# EAGLE board target_control_panel (EAGLE 6.5.0)
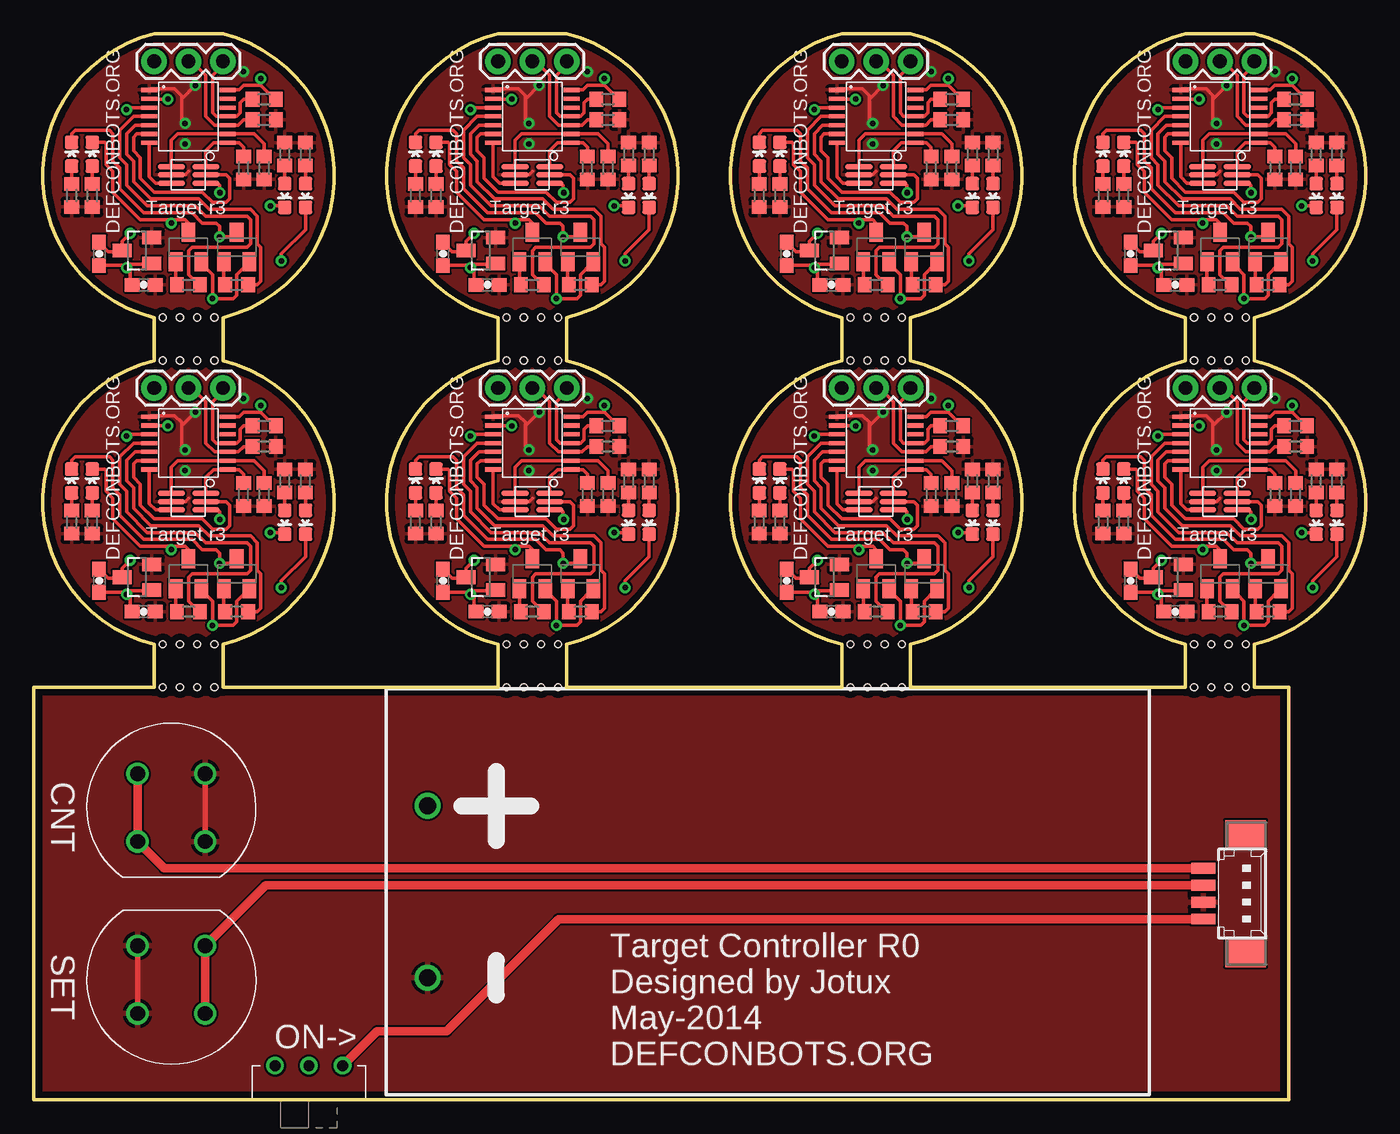
[diagram p0: board, top side]
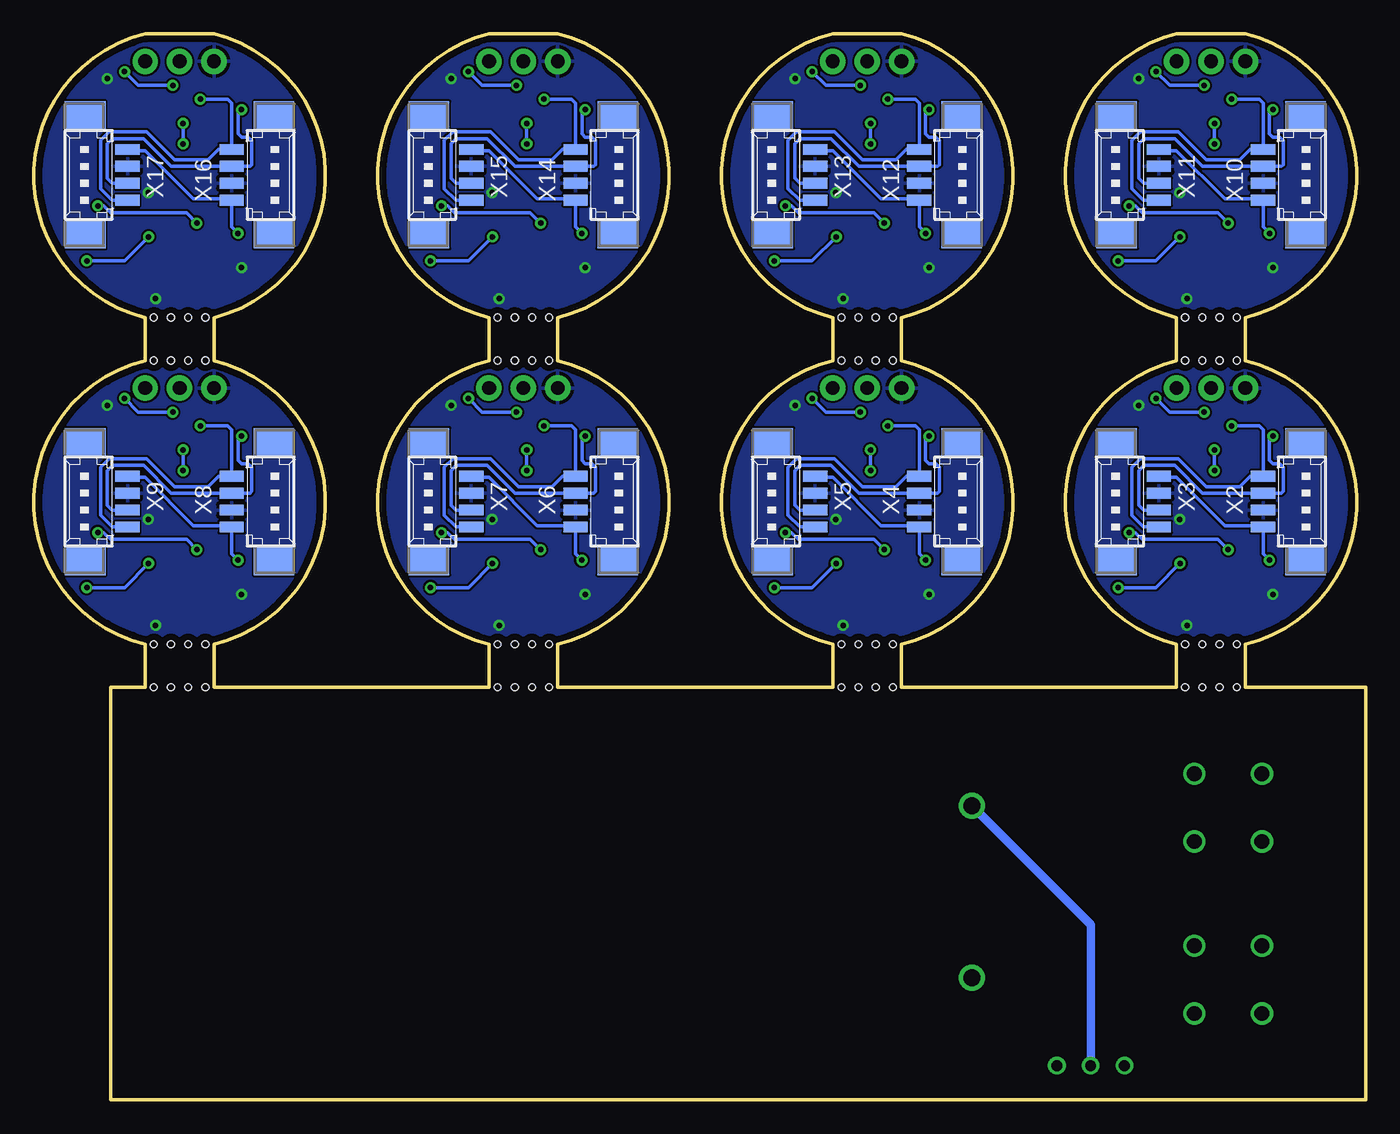
[diagram p1: board, bottom side, seen from below]

Size 98.4 x 78.74 mm. Coordinates in mm from the lower left corner, seen from the top.
Outline: 92.71,30.48 90.17,30.48 90.17,33.66 arc153 90.17,54.61 90.17,57.78 arc153 90.17,78.74 85.09,78.74 arc153 85.09,57.78 85.09,54.61 arc153 85.09,33.66 85.09,30.48 64.77,30.48 64.77,33.66 arc153 64.77,54.61 64.77,57.78 arc153 64.77,78.74 59.69,78.74 arc153 59.69,57.78 59.69,54.61 arc153 59.69,33.66 59.69,30.48 39.37,30.48 39.37,33.66 arc153 39.37,54.61 39.37,57.78 arc153 39.37,78.74 34.29,78.74 arc153 34.29,57.78 34.29,54.61 arc153 34.29,33.66 34.29,30.48 13.97,30.48 13.97,33.66 arc153 13.97,54.61 13.97,57.78 arc153 13.97,78.74 8.89,78.74 arc153 8.89,57.78 8.89,54.61 arc153 8.89,33.66 8.89,30.48 0,30.48 0,0 92.71,0 92.71,30.48
Copper layers (1*16): Top 0.035mm / dielectric 1.5mm / Bottom 0.035mm
Design rules "default": minimum track width 6mil, minimum drill 16mil, track to track 6mil, track to pad 6mil, pad to pad 6mil, via to via 6mil, smd to smd 6mil, copper to edge 20mil, drill to drill 8mil, minimum pad ring 10mil, minimum via ring 8mil, stop-mask expansion 4mil, vias tented up to drill 0mil, thermal gap 10mil
Holes 0.51 mm at 9.53,33.66 10.79,33.66 12.06,33.66 13.34,33.66 13.34,30.48 12.06,30.48 10.79,30.48 9.53,30.48 34.92,33.66 36.2,33.66 37.47,33.66 38.73,33.66 38.73,30.48 37.47,30.48 36.2,30.48 34.92,30.48 60.33,33.66 61.59,33.66 62.87,33.66 64.14,33.66 64.14,30.48 62.87,30.48 61.59,30.48 60.33,30.48 85.72,33.66 87,33.66 88.27,33.66 89.53,33.66 89.53,30.48 88.27,30.48 87,30.48 85.72,30.48 9.53,57.78 10.79,57.78 12.06,57.78 13.34,57.78 13.34,54.61 12.06,54.61 10.79,54.61 9.53,54.61 34.92,57.78 36.2,57.78 37.47,57.78 38.73,57.78 38.73,54.61 37.47,54.61 36.2,54.61 34.92,54.61 60.33,57.78 61.59,57.78 62.87,57.78 64.14,57.78 64.14,54.61 62.87,54.61 61.59,54.61 60.33,54.61 85.72,57.78 87,57.78 88.27,57.78 89.53,57.78 89.53,54.61 88.27,54.61 87,54.61 85.72,54.61

## Footprints (pad centres in the part's own frame; a part is rotated, then mirrored left to right if it is on the bottom)
0603-CAP = smd 1.1 x 1: 1 -0.85,0; 2 0.85,0
LED-0603 = smd 1 x 1: A 0,-0.877; C 0,0.877
BH9V-PC-ND = drill 1.27: N 8.64,-3.05; P 21.34,-3.05
1X03 = drill 1.016 pad 1.88: 1 0,0; 2 2.54,0; 3 5.08,0
R0603 = smd 1 x 1.1: 1 -0.85,0; 2 0.85,0
D6F = drill 1.1: A1 2.5,2.5; A2 -2.5,2.5; B1 2.5,-2.5; B2 -2.5,-2.5
EG1270 = drill 0.8: P$1 0,2.5; P$2 0,0; P$3 0,-2.5
SOT23-BEC = smd 1 x 1.4: B -0.95,-1.1; C 0,1.1; E 0.95,-1.1
SOT23 = smd 1 x 1.4: 1 -0.95,-1.1; 2 0.95,-1.1; 3 0,1.1
PW14 = smd 0.3 x 1.2: 1 -1.95,-2.9; 2 -1.3,-2.9; 3 -0.65,-2.9; 4 0,-2.9; 5 0.65,-2.9; 6 1.3,-2.9; 7 1.95,-2.9; 8 1.95,2.9; 9 1.3,2.9; 10 0.65,2.9; 11 0,2.9; 12 -0.65,2.9; 13 -1.3,2.9; 14 -1.95,2.9
CS-6 = smd 0.4 x 2: A1 -0.61,1.28; A2 0,1.28; A3 0.61,1.28; B1 -0.61,-1.27; B2 0,-1.27; B3 0.61,-1.27
53398-04 = smd 0.8 x 1.8: 1 1.875,-2.5; 2 0.625,-2.5; 3 -0.625,-2.5; 4 -1.875,-2.5 | smd 2.1 x 3: S1 4.375,0.625; S2 -4.375,0.625

## Placement (x,y rotation side)
C1  C1608X5R1C106M080AB  [0603-CAP]  4.83,38.35 270 top
C2  C1608X5R1C106M080AB  [0603-CAP]  8.13,36.07 180 top
C3  C1608X5R1C106M080AB  [0603-CAP]  30.23,38.35 270 top
C4  C1608X5R1C106M080AB  [0603-CAP]  33.53,36.07 180 top
C5  C1608X5R1C106M080AB  [0603-CAP]  55.63,38.35 270 top
C6  C1608X5R1C106M080AB  [0603-CAP]  58.93,36.07 180 top
C7  C1608X5R1C106M080AB  [0603-CAP]  81.03,38.35 270 top
C8  C1608X5R1C106M080AB  [0603-CAP]  84.33,36.07 180 top
C9  C1608X5R1C106M080AB  [0603-CAP]  4.83,62.48 270 top
C10  C1608X5R1C106M080AB  [0603-CAP]  8.13,60.2 180 top
C11  C1608X5R1C106M080AB  [0603-CAP]  30.23,62.48 270 top
C12  C1608X5R1C106M080AB  [0603-CAP]  33.53,60.2 180 top
C13  C1608X5R1C106M080AB  [0603-CAP]  55.63,62.48 270 top
C14  C1608X5R1C106M080AB  [0603-CAP]  58.93,60.2 180 top
C15  C1608X5R1C106M080AB  [0603-CAP]  81.03,62.48 270 top
C16  C1608X5R1C106M080AB  [0603-CAP]  84.33,60.2 180 top
D1  VLMB1300-GS08  [LED-0603]  20.07,42.67 180 top
D2  VLMB1300-GS08  [LED-0603]  2.79,45.72 0 top
D3  VLMS1300-GS08  [LED-0603]  18.54,42.67 180 top
D4  VLMS1300-GS08  [LED-0603]  4.32,45.72 0 top
D5  VLMB1300-GS08  [LED-0603]  28.19,45.72 0 top
D6  VLMB1300-GS08  [LED-0603]  45.47,42.67 180 top
D7  VLMS1300-GS08  [LED-0603]  43.94,42.67 180 top
D8  VLMS1300-GS08  [LED-0603]  29.72,45.72 0 top
D9  VLMB1300-GS08  [LED-0603]  53.59,45.72 0 top
D10  VLMB1300-GS08  [LED-0603]  70.87,42.67 180 top
D11  VLMS1300-GS08  [LED-0603]  69.34,42.67 180 top
D12  VLMS1300-GS08  [LED-0603]  55.12,45.72 0 top
D13  VLMB1300-GS08  [LED-0603]  78.99,45.72 0 top
D14  VLMB1300-GS08  [LED-0603]  96.27,42.67 180 top
D15  VLMS1300-GS08  [LED-0603]  94.74,42.67 180 top
D16  VLMS1300-GS08  [LED-0603]  80.52,45.72 0 top
D17  VLMB1300-GS08  [LED-0603]  2.79,69.85 0 top
D18  VLMB1300-GS08  [LED-0603]  20.07,66.8 180 top
D19  VLMS1300-GS08  [LED-0603]  18.54,66.8 180 top
D20  VLMS1300-GS08  [LED-0603]  4.32,69.85 0 top
D21  VLMB1300-GS08  [LED-0603]  28.19,69.85 0 top
D22  VLMB1300-GS08  [LED-0603]  45.47,66.8 180 top
D23  VLMS1300-GS08  [LED-0603]  43.94,66.8 180 top
D24  VLMS1300-GS08  [LED-0603]  29.72,69.85 0 top
D25  VLMB1300-GS08  [LED-0603]  53.59,69.85 0 top
D26  VLMB1300-GS08  [LED-0603]  70.87,66.8 180 top
D27  VLMS1300-GS08  [LED-0603]  69.34,66.8 180 top
D28  VLMS1300-GS08  [LED-0603]  55.12,69.85 0 top
D29  VLMB1300-GS08  [LED-0603]  78.99,69.85 0 top
D30  VLMB1300-GS08  [LED-0603]  96.27,66.8 180 top
D31  VLMS1300-GS08  [LED-0603]  94.74,66.8 180 top
D32  VLMS1300-GS08  [LED-0603]  80.52,69.85 0 top
G1  AB9VBH9V  [BH9V-PC-ND]  26.04,0.38 90 top
JP1  [1X03]  13.97,52.58 180 top
JP2  [1X03]  39.37,52.58 180 top
JP3  [1X03]  64.77,52.58 180 top
JP4  [1X03]  90.17,52.58 180 top
JP5  [1X03]  13.97,76.71 180 top
JP6  [1X03]  39.37,76.71 180 top
JP7  [1X03]  64.77,76.71 180 top
JP8  [1X03]  90.17,76.71 180 top
R1  RK73H1JTTD4702F  [R0603]  17.02,48.26 0 top
R2  RK73H1JTTD4702F  [R0603]  17.02,49.78 180 top
R3  CRCW0603200RFKEA  [R0603]  20.07,45.72 90 top
R4  CRCW0603200RFKEA  [R0603]  2.79,42.67 270 top
R5  CRCW0603200RFKEA  [R0603]  14.99,36.07 0 top
R6  CRCW0603200RFKEA  [R0603]  18.54,45.72 90 top
R7  CRCW0603200RFKEA  [R0603]  4.32,42.67 270 top
R8  CRCW0603200RFKEA  [R0603]  11.43,36.07 0 top
R9  RK73H1JTTD4701F  [R0603]  17.02,44.7 270 top
R10  RK73H1JTTD4701F  [R0603]  15.49,44.7 270 top
R11  CRCW0603200RFKEA  [R0603]  28.19,42.67 270 top
R12  CRCW0603200RFKEA  [R0603]  45.47,45.72 90 top
R13  CRCW0603200RFKEA  [R0603]  40.39,36.07 0 top
R14  CRCW0603200RFKEA  [R0603]  43.94,45.72 90 top
R15  RK73H1JTTD4702F  [R0603]  42.42,48.26 0 top
R16  RK73H1JTTD4702F  [R0603]  42.42,49.78 180 top
R17  CRCW0603200RFKEA  [R0603]  29.72,42.67 270 top
R18  CRCW0603200RFKEA  [R0603]  36.83,36.07 0 top
R19  RK73H1JTTD4701F  [R0603]  42.42,44.7 270 top
R20  RK73H1JTTD4701F  [R0603]  40.89,44.7 270 top
R21  CRCW0603200RFKEA  [R0603]  53.59,42.67 270 top
R22  CRCW0603200RFKEA  [R0603]  70.87,45.72 90 top
R23  CRCW0603200RFKEA  [R0603]  65.79,36.07 0 top
R24  CRCW0603200RFKEA  [R0603]  69.34,45.72 90 top
R25  RK73H1JTTD4702F  [R0603]  67.82,48.26 0 top
R26  RK73H1JTTD4702F  [R0603]  67.82,49.78 180 top
R27  CRCW0603200RFKEA  [R0603]  55.12,42.67 270 top
R28  CRCW0603200RFKEA  [R0603]  62.23,36.07 0 top
R29  RK73H1JTTD4701F  [R0603]  67.82,44.7 270 top
R30  RK73H1JTTD4701F  [R0603]  66.29,44.7 270 top
R31  CRCW0603200RFKEA  [R0603]  78.99,42.67 270 top
R32  CRCW0603200RFKEA  [R0603]  96.27,45.72 90 top
R33  CRCW0603200RFKEA  [R0603]  91.19,36.07 0 top
R34  CRCW0603200RFKEA  [R0603]  94.74,45.72 90 top
R35  RK73H1JTTD4702F  [R0603]  93.22,48.26 0 top
R36  RK73H1JTTD4702F  [R0603]  93.22,49.78 180 top
R37  CRCW0603200RFKEA  [R0603]  80.52,42.67 270 top
R38  CRCW0603200RFKEA  [R0603]  87.63,36.07 0 top
R39  RK73H1JTTD4701F  [R0603]  93.22,44.7 270 top
R40  RK73H1JTTD4701F  [R0603]  91.69,44.7 270 top
R41  CRCW0603200RFKEA  [R0603]  2.79,66.8 270 top
R42  CRCW0603200RFKEA  [R0603]  20.07,69.85 90 top
R43  CRCW0603200RFKEA  [R0603]  14.99,60.2 0 top
R44  CRCW0603200RFKEA  [R0603]  18.54,69.85 90 top
R45  RK73H1JTTD4702F  [R0603]  17.02,72.39 0 top
R46  RK73H1JTTD4702F  [R0603]  17.02,73.91 180 top
R47  CRCW0603200RFKEA  [R0603]  4.32,66.8 270 top
R48  CRCW0603200RFKEA  [R0603]  11.43,60.2 0 top
R49  RK73H1JTTD4701F  [R0603]  17.02,68.83 270 top
R50  RK73H1JTTD4701F  [R0603]  15.49,68.83 270 top
R51  CRCW0603200RFKEA  [R0603]  28.19,66.8 270 top
R52  CRCW0603200RFKEA  [R0603]  45.47,69.85 90 top
R53  CRCW0603200RFKEA  [R0603]  40.39,60.2 0 top
R54  CRCW0603200RFKEA  [R0603]  43.94,69.85 90 top
R55  RK73H1JTTD4702F  [R0603]  42.42,72.39 0 top
R56  RK73H1JTTD4702F  [R0603]  42.42,73.91 180 top
R57  CRCW0603200RFKEA  [R0603]  29.72,66.8 270 top
R58  CRCW0603200RFKEA  [R0603]  36.83,60.2 0 top
R59  RK73H1JTTD4701F  [R0603]  42.42,68.83 270 top
R60  RK73H1JTTD4701F  [R0603]  40.89,68.83 270 top
R61  CRCW0603200RFKEA  [R0603]  53.59,66.8 270 top
R62  CRCW0603200RFKEA  [R0603]  70.87,69.85 90 top
R63  CRCW0603200RFKEA  [R0603]  65.79,60.2 0 top
R64  CRCW0603200RFKEA  [R0603]  69.34,69.85 90 top
R65  RK73H1JTTD4702F  [R0603]  67.82,72.39 0 top
R66  RK73H1JTTD4702F  [R0603]  67.82,73.91 180 top
R67  CRCW0603200RFKEA  [R0603]  55.12,66.8 270 top
R68  CRCW0603200RFKEA  [R0603]  62.23,60.2 0 top
R69  RK73H1JTTD4701F  [R0603]  67.82,68.83 270 top
R70  RK73H1JTTD4701F  [R0603]  66.29,68.83 270 top
R71  CRCW0603200RFKEA  [R0603]  78.99,66.8 270 top
R72  CRCW0603200RFKEA  [R0603]  96.27,69.85 90 top
R73  CRCW0603200RFKEA  [R0603]  91.19,60.2 0 top
R74  CRCW0603200RFKEA  [R0603]  94.74,69.85 90 top
R75  RK73H1JTTD4702F  [R0603]  93.22,72.39 0 top
R76  RK73H1JTTD4702F  [R0603]  93.22,73.91 180 top
R77  CRCW0603200RFKEA  [R0603]  80.52,66.8 270 top
R78  CRCW0603200RFKEA  [R0603]  87.63,60.2 0 top
R79  RK73H1JTTD4701F  [R0603]  93.22,68.83 270 top
R80  RK73H1JTTD4701F  [R0603]  91.69,68.83 270 top
S1  [D6F]  10.16,8.89 270 top
S2  [D6F]  10.16,21.59 90 top
S3  [EG1270]  20.32,2.54 270 top
T1  PMBT4401,215  [SOT23-BEC]  14.99,38.86 0 top
T2  PMBT4401,215  [SOT23-BEC]  11.43,38.86 0 top
T3  PMBT4401,215  [SOT23-BEC]  40.39,38.86 0 top
T4  PMBT4401,215  [SOT23-BEC]  36.83,38.86 0 top
T5  PMBT4401,215  [SOT23-BEC]  65.79,38.86 0 top
T6  PMBT4401,215  [SOT23-BEC]  62.23,38.86 0 top
T7  PMBT4401,215  [SOT23-BEC]  91.19,38.86 0 top
T8  PMBT4401,215  [SOT23-BEC]  87.63,38.86 0 top
T9  PMBT4401,215  [SOT23-BEC]  14.99,62.99 0 top
T10  PMBT4401,215  [SOT23-BEC]  11.43,62.99 0 top
T11  PMBT4401,215  [SOT23-BEC]  40.39,62.99 0 top
T12  PMBT4401,215  [SOT23-BEC]  36.83,62.99 0 top
T13  PMBT4401,215  [SOT23-BEC]  65.79,62.99 0 top
T14  PMBT4401,215  [SOT23-BEC]  62.23,62.99 0 top
T15  PMBT4401,215  [SOT23-BEC]  91.19,62.99 0 top
T16  PMBT4401,215  [SOT23-BEC]  87.63,62.99 0 top
U1  MCP1703T-3002E/CB  [SOT23]  7.62,38.61 90 top
U2  MSP430G2452IPW14R  [PW14]  11.43,48.51 270 top
U3  TCS3414CS  [CS-6]  11.43,44.2 270 top
U4  MCP1703T-3002E/CB  [SOT23]  33.02,38.61 90 top
U5  TCS3414CS  [CS-6]  36.83,44.2 270 top
U6  MSP430G2452IPW14R  [PW14]  36.83,48.51 270 top
U7  MCP1703T-3002E/CB  [SOT23]  58.42,38.61 90 top
U8  TCS3414CS  [CS-6]  62.23,44.2 270 top
U9  MSP430G2452IPW14R  [PW14]  62.23,48.51 270 top
U10  MCP1703T-3002E/CB  [SOT23]  83.82,38.61 90 top
U11  TCS3414CS  [CS-6]  87.63,44.2 270 top
U12  MSP430G2452IPW14R  [PW14]  87.63,48.51 270 top
U13  MCP1703T-3002E/CB  [SOT23]  7.62,62.74 90 top
U14  TCS3414CS  [CS-6]  11.43,68.33 270 top
U15  MSP430G2452IPW14R  [PW14]  11.43,72.64 270 top
U16  MCP1703T-3002E/CB  [SOT23]  33.02,62.74 90 top
U17  TCS3414CS  [CS-6]  36.83,68.33 270 top
U18  MSP430G2452IPW14R  [PW14]  36.83,72.64 270 top
U19  MCP1703T-3002E/CB  [SOT23]  58.42,62.74 90 top
U20  TCS3414CS  [CS-6]  62.23,68.33 270 top
U21  MSP430G2452IPW14R  [PW14]  62.23,72.64 270 top
U22  MCP1703T-3002E/CB  [SOT23]  83.82,62.74 90 top
U23  TCS3414CS  [CS-6]  87.63,68.33 270 top
U24  MSP430G2452IPW14R  [PW14]  87.63,72.64 270 top
X1  DF13-4P-1.25V(50)  [53398-04]  88.9,15.24 270 top
X2  DF13-4P-1.25V(50)  [53398-04]  5.08,44.2 270 bottom
X3  DF13-4P-1.25V(50)  [53398-04]  17.78,44.2 90 bottom
X4  DF13-4P-1.25V(50)  [53398-04]  30.48,44.2 270 bottom
X5  DF13-4P-1.25V(50)  [53398-04]  43.18,44.2 90 bottom
X6  DF13-4P-1.25V(50)  [53398-04]  55.88,44.2 270 bottom
X7  DF13-4P-1.25V(50)  [53398-04]  68.58,44.2 90 bottom
X8  DF13-4P-1.25V(50)  [53398-04]  81.28,44.2 270 bottom
X9  DF13-4P-1.25V(50)  [53398-04]  93.98,44.2 90 bottom
X10  DF13-4P-1.25V(50)  [53398-04]  5.08,68.33 270 bottom
X11  DF13-4P-1.25V(50)  [53398-04]  17.78,68.33 90 bottom
X12  DF13-4P-1.25V(50)  [53398-04]  30.48,68.33 270 bottom
X13  DF13-4P-1.25V(50)  [53398-04]  43.18,68.33 90 bottom
X14  DF13-4P-1.25V(50)  [53398-04]  55.88,68.33 270 bottom
X15  DF13-4P-1.25V(50)  [53398-04]  68.58,68.33 90 bottom
X16  DF13-4P-1.25V(50)  [53398-04]  81.28,68.33 270 bottom
X17  DF13-4P-1.25V(50)  [53398-04]  93.98,68.33 90 bottom

## Library data of the parts
C1-C16 = SparkFun-Passives
D1-D32 = SparkFun-LED
G1 = joe
JP1-JP8 = SparkFun-Connectors
R1-R80 = rcl
S1-S3 U3 U5 U8 U11 U14 U17 U20 U23 = torpedo
T1-T16 = transistor
U1 U4 U7 U10 U13 U16 U19 U22 = linear
U2 U6 U9 U12 U15 U18 U21 U24 = TI_MSP430_v16
X1-X17 = con-molex; OC_FARNELL: 1125367; OC_NEWARK: unknown

## Nets
+3V1: C4.1 R11.2 R12.2 R14.2 R15.2 R17.2 R19.2 R20.2 U4.2 U5.B2 U6.1
+3V2: C6.1 R21.2 R22.2 R24.2 R25.2 R27.2 R29.2 R30.2 U7.2 U8.B2 U9.1
+3V3: C2.1 R1.2 R3.2 R4.2 R6.2 R7.2 R9.2 R10.2 U1.2 U2.1 U3.B2
+3V4: C8.1 R31.2 R32.2 R34.2 R35.2 R37.2 R39.2 R40.2 U10.2 U11.B2 U12.1
+3V5: C10.1 R41.2 R42.2 R44.2 R45.2 R47.2 R49.2 R50.2 U13.2 U14.B2 U15.1
+3V6: C12.1 R51.2 R52.2 R54.2 R55.2 R57.2 R59.2 R60.2 U16.2 U17.B2 U18.1
+3V7: C14.1 R61.2 R62.2 R64.2 R65.2 R67.2 R69.2 R70.2 U19.2 U20.B2 U21.1
+3V8: C16.1 R71.2 R72.2 R74.2 R75.2 R77.2 R79.2 R80.2 U22.2 U23.B2 U24.1
BLUE_LED: R5.2 U2.5
BLUE_LED1: R13.2 U6.5
BLUE_LED2: R23.2 U9.5
BLUE_LED3: R33.2 U12.5
BLUE_LED4: R43.2 U15.5
BLUE_LED5: R53.2 U18.5
BLUE_LED6: R63.2 U21.5
BLUE_LED7: R73.2 U24.5
CLK: R10.1 U2.8 U3.A1
CLK1: R20.1 U5.A1 U6.8
CLK2: R30.1 U8.A1 U9.8
CLK3: R40.1 U11.A1 U12.8
CLK4: R50.1 U14.A1 U15.8
CLK5: R60.1 U17.A1 U18.8
CLK6: R70.1 U20.A1 U21.8
CLK7: R80.1 U23.A1 U24.8
CNT: S2.A1 S2.A2 X1.4
CNT1: U2.2 X2.4 X3.4
CNT2: U6.2 X4.4 X5.4
CNT3: U9.2 X6.4 X7.4
CNT4: U12.2 X8.4 X9.4
CNT5: U15.2 X10.4 X11.4
CNT6: U18.2 X12.4 X13.4
CNT7: U21.2 X14.4 X15.4
CNT8: U24.2 X16.4 X17.4
DAT: R9.1 U2.9 U3.B1
DAT1: R19.1 U5.B1 U6.9
DAT2: R29.1 U8.B1 U9.9
DAT3: R39.1 U11.B1 U12.9
DAT4: R49.1 U14.B1 U15.9
DAT5: R59.1 U17.B1 U18.9
DAT6: R69.1 U20.B1 U21.9
DAT7: R79.1 U23.B1 U24.9
GND1: C1.2 C2.2 JP1.3 R2.1 T1.E T2.E U1.1 U2.14 U3.A3 X2.2 X3.2
GND2: C3.2 C4.2 JP2.3 R16.1 T3.E T4.E U4.1 U5.A3 U6.14 X4.2 X5.2
GND3: C5.2 C6.2 JP3.3 R26.1 T5.E T6.E U7.1 U8.A3 U9.14 X6.2 X7.2
GND4: C7.2 C8.2 JP4.3 R36.1 T7.E T8.E U10.1 U11.A3 U12.14 X8.2 X9.2
GND5: C9.2 C10.2 JP5.3 R46.1 T9.E T10.E U13.1 U14.A3 U15.14 X10.2 X11.2
GND6: C11.2 C12.2 JP6.3 R56.1 T11.E T12.E U16.1 U17.A3 U18.14 X12.2 X13.2
GND7: C13.2 C14.2 JP7.3 R66.1 T13.E T14.E U19.1 U20.A3 U21.14 X14.2 X15.2
GND8: C15.2 C16.2 JP8.3 R76.1 T15.E T16.E U22.1 U23.A3 U24.14 X16.2 X17.2
GND9: G1.N S1.B1 S1.B2 S2.B1 S2.B2 X1.2
INT: U2.7 U3.B3
INT1: U5.B3 U6.7
INT2: U8.B3 U9.7
INT3: U11.B3 U12.7
INT4: U14.B3 U15.7
INT5: U17.B3 U18.7
INT6: U20.B3 U21.7
INT7: U23.B3 U24.7
LED: D1.C D2.C T1.C
LED1: D5.C D6.C T3.C
LED2: D9.C D10.C T5.C
LED3: D13.C D14.C T7.C
LED4: D17.C D18.C T9.C
LED5: D21.C D22.C T11.C
LED6: D25.C D26.C T13.C
LED7: D29.C D30.C T15.C
N$1: D4.A R7.1
N$2: D3.C D4.C T2.C
N$3: R8.1 T2.B
N$4: G1.P S3.P$2
N$5: D5.A R11.1
N$6: D2.A R4.1
N$7: D1.A R3.1
N$8: D6.A R12.1
N$9: R13.1 T3.B
N$10: D3.A R6.1
N$11: D7.A R14.1
N$12: D8.A R17.1
N$13: D7.C D8.C T4.C
N$14: R18.1 T4.B
N$15: D9.A R21.1
N$16: D10.A R22.1
N$17: R23.1 T5.B
N$18: R5.1 T1.B
N$19: D11.A R24.1
N$20: D12.A R27.1
N$21: D11.C D12.C T6.C
N$22: R28.1 T6.B
N$23: D13.A R31.1
N$24: D14.A R32.1
N$25: R33.1 T7.B
N$26: D15.A R34.1
N$27: D16.A R37.1
N$28: D15.C D16.C T8.C
N$29: R38.1 T8.B
N$30: D17.A R41.1
N$31: D18.A R42.1
N$32: R43.1 T9.B
N$33: D19.A R44.1
N$34: D20.A R47.1
N$35: D19.C D20.C T10.C
N$36: R48.1 T10.B
N$37: D21.A R51.1
N$38: D22.A R52.1
N$39: R53.1 T11.B
N$40: D23.A R54.1
N$41: D24.A R57.1
N$42: D23.C D24.C T12.C
N$43: R58.1 T12.B
N$44: D25.A R61.1
N$45: D26.A R62.1
N$46: R63.1 T13.B
N$47: D27.A R64.1
N$48: D28.A R67.1
N$49: D27.C D28.C T14.C
N$50: R68.1 T14.B
N$51: D29.A R71.1
N$52: D30.A R72.1
N$53: R73.1 T15.B
N$54: D31.A R74.1
N$55: D32.A R77.1
N$56: D31.C D32.C T16.C
N$57: R78.1 T16.B
RED_LED: R8.2 U2.4
RED_LED1: R18.2 U6.4
RED_LED2: R28.2 U9.4
RED_LED3: R38.2 U12.4
RED_LED4: R48.2 U15.4
RED_LED5: R58.2 U18.4
RED_LED6: R68.2 U21.4
RED_LED7: R78.2 U24.4
RST: JP1.2 R1.1 U2.10
RST1: JP2.2 R15.1 U6.10
RST2: JP3.2 R25.1 U9.10
RST3: JP4.2 R35.1 U12.10
RST4: JP5.2 R45.1 U15.10
RST5: JP6.2 R55.1 U18.10
RST6: JP7.2 R65.1 U21.10
RST7: JP8.2 R75.1 U24.10
SET: S1.A1 S1.A2 X1.3
SET1: U2.3 X2.3 X3.3
SET2: U6.3 X4.3 X5.3
SET3: U9.3 X6.3 X7.3
SET4: U12.3 X8.3 X9.3
SET5: U15.3 X10.3 X11.3
SET6: U18.3 X12.3 X13.3
SET7: U21.3 X14.3 X15.3
SET8: U24.3 X16.3 X17.3
SYNC: U2.6 U3.A2
SYNC1: U5.A2 U6.6
SYNC2: U8.A2 U9.6
SYNC3: U11.A2 U12.6
SYNC4: U14.A2 U15.6
SYNC5: U17.A2 U18.6
SYNC6: U20.A2 U21.6
SYNC7: U23.A2 U24.6
TEST: JP1.1 R2.2 U2.11
TEST1: JP2.1 R16.2 U6.11
TEST2: JP3.1 R26.2 U9.11
TEST3: JP4.1 R36.2 U12.11
TEST4: JP5.1 R46.2 U15.11
TEST5: JP6.1 R56.2 U18.11
TEST6: JP7.1 R66.2 U21.11
TEST7: JP8.1 R76.2 U24.11
VIN: S3.P$1 X1.1
VIN1: C1.1 U1.3 X2.1 X3.1
VIN2: C3.1 U4.3 X4.1 X5.1
VIN3: C5.1 U7.3 X6.1 X7.1
VIN4: C7.1 U10.3 X8.1 X9.1
VIN5: C9.1 U13.3 X10.1 X11.1
VIN6: C11.1 U16.3 X12.1 X13.1
VIN7: C13.1 U19.3 X14.1 X15.1
VIN8: C15.1 U22.3 X16.1 X17.1

## Tracks (layer width: path | path; a pad name or v marks a point on that pad's centre or on a via)
+3V1  (via drill 0.41)
  Top 0.254: v36.58,48.01 36.32,48.26 36.32,49.78 | 36.32,49.78 36.32,50.04 35.81,50.55 34.04,50.55 U6.1 | U5.B2 36.58,44.2 36.83,44.45 | 36.32,49.78 v37.34,50.8
  Bottom 0.254: v36.58,48.01 v36.58,46.48 | v40.89,51.82 39.88,50.8 v37.34,50.8
  pour Top: 25.4,34.29 48.26,34.29 48.26,54.61 25.4,54.61
+3V2  (via drill 0.41)
  Top 0.254: v61.98,48.01 61.72,48.26 61.72,49.78 | 61.72,49.78 61.72,50.04 61.21,50.55 59.44,50.55 U9.1 | U8.B2 61.98,44.2 62.23,44.45 | 61.72,49.78 v62.74,50.8
  Bottom 0.254: v61.98,48.01 v61.98,46.48 | v66.29,51.82 65.28,50.8 v62.74,50.8
  pour Top: 50.8,34.29 73.66,34.29 73.66,54.61 50.8,54.61
+3V3  (via drill 0.41)
  Top 0.254: v11.18,48.01 10.92,48.26 10.92,49.78 | 10.92,49.78 10.92,50.04 10.41,50.55 8.64,50.55 U2.1 | U3.B2 11.18,44.2 11.43,44.45 | 10.92,49.78 v11.94,50.8
  Bottom 0.254: v11.18,48.01 v11.18,46.48 | v15.49,51.82 14.48,50.8 v11.94,50.8
  pour Top: 0,34.29 22.86,34.29 22.86,54.61 0,54.61
+3V4  (via drill 0.41)
  Top 0.254: v87.38,48.01 87.12,48.26 87.12,49.78 | 87.12,49.78 87.12,50.04 86.61,50.55 84.84,50.55 U12.1 | U11.B2 87.38,44.2 87.63,44.45 | 87.12,49.78 v88.14,50.8
  Bottom 0.254: v87.38,48.01 v87.38,46.48 | v91.69,51.82 90.68,50.8 v88.14,50.8
  pour Top: 76.2,34.29 99.06,34.29 99.06,54.61 76.2,54.61
+3V5  (via drill 0.41)
  Top 0.254: v11.18,72.14 10.92,72.39 10.92,73.91 | 10.92,73.91 10.92,74.17 10.41,74.68 8.64,74.68 U15.1 | U14.B2 11.18,68.33 11.43,68.58 | 10.92,73.91 v11.94,74.93
  Bottom 0.254: v11.18,72.14 v11.18,70.61 | v15.49,75.95 14.48,74.93 v11.94,74.93
  pour Top: 0,58.42 22.86,58.42 22.86,78.74 0,78.74
+3V6  (via drill 0.41)
  Top 0.254: v36.58,72.14 36.32,72.39 36.32,73.91 | 36.32,73.91 36.32,74.17 35.81,74.68 34.04,74.68 U18.1 | U17.B2 36.58,68.33 36.83,68.58 | 36.32,73.91 v37.34,74.93
  Bottom 0.254: v36.58,72.14 v36.58,70.61 | v40.89,75.95 39.88,74.93 v37.34,74.93
  pour Top: 25.4,58.42 48.26,58.42 48.26,78.74 25.4,78.74
+3V7  (via drill 0.41)
  Top 0.254: v61.98,72.14 61.72,72.39 61.72,73.91 | 61.72,73.91 61.72,74.17 61.21,74.68 59.44,74.68 U21.1 | U20.B2 61.98,68.33 62.23,68.58 | 61.72,73.91 v62.74,74.93
  Bottom 0.254: v61.98,72.14 v61.98,70.61 | v66.29,75.95 65.28,74.93 v62.74,74.93
  pour Top: 50.8,58.42 73.66,58.42 73.66,78.74 50.8,78.74
+3V8  (via drill 0.41)
  Top 0.254: v87.38,72.14 87.12,72.39 87.12,73.91 | 87.12,73.91 87.12,74.17 86.61,74.68 84.84,74.68 U24.1 | U23.B2 87.38,68.33 87.63,68.58 | 87.12,73.91 v88.14,74.93
  Bottom 0.254: v87.38,72.14 v87.38,70.61 | v91.69,75.95 90.68,74.93 v88.14,74.93
  pour Top: 76.2,58.42 99.06,58.42 99.06,78.74 76.2,78.74
BLUE_LED
  Top 0.254: R5.2 16.51,36.07 16.76,36.32 16.76,38.86 16.51,39.12 16.51,41.15 16,41.66 12.95,41.66 12.19,42.42 8.64,42.42 7.37,43.69 7.37,45.21 6.86,45.72 6.86,47.24 7.48,47.86 U2.5
BLUE_LED1
  Top 0.254: R13.2 41.91,36.07 42.16,36.32 42.16,38.86 41.91,39.12 41.91,41.15 41.4,41.66 38.35,41.66 37.59,42.42 34.04,42.42 32.77,43.69 32.77,45.21 32.26,45.72 32.26,47.24 32.88,47.86 U6.5
BLUE_LED2
  Top 0.254: R23.2 67.31,36.07 67.56,36.32 67.56,38.86 67.31,39.12 67.31,41.15 66.8,41.66 63.75,41.66 62.99,42.42 59.44,42.42 58.17,43.69 58.17,45.21 57.66,45.72 57.66,47.24 58.28,47.86 U9.5
BLUE_LED3
  Top 0.254: R33.2 92.71,36.07 92.96,36.32 92.96,38.86 92.71,39.12 92.71,41.15 92.2,41.66 89.15,41.66 88.39,42.42 84.84,42.42 83.57,43.69 83.57,45.21 83.06,45.72 83.06,47.24 83.68,47.86 U12.5
BLUE_LED4
  Top 0.254: R43.2 16.51,60.2 16.76,60.45 16.76,62.99 16.51,63.25 16.51,65.28 16,65.79 12.95,65.79 12.19,66.55 8.64,66.55 7.37,67.82 7.37,69.34 6.86,69.85 6.86,71.37 7.48,71.99 U15.5
BLUE_LED5
  Top 0.254: R53.2 41.91,60.2 42.16,60.45 42.16,62.99 41.91,63.25 41.91,65.28 41.4,65.79 38.35,65.79 37.59,66.55 34.04,66.55 32.77,67.82 32.77,69.34 32.26,69.85 32.26,71.37 32.88,71.99 U18.5
BLUE_LED6
  Top 0.254: R63.2 67.31,60.2 67.56,60.45 67.56,62.99 67.31,63.25 67.31,65.28 66.8,65.79 63.75,65.79 62.99,66.55 59.44,66.55 58.17,67.82 58.17,69.34 57.66,69.85 57.66,71.37 58.28,71.99 U21.5
BLUE_LED7
  Top 0.254: R73.2 92.71,60.2 92.96,60.45 92.96,62.99 92.71,63.25 92.71,65.28 92.2,65.79 89.15,65.79 88.39,66.55 84.84,66.55 83.57,67.82 83.57,69.34 83.06,69.85 83.06,71.37 83.68,71.99 U24.5
CLK
  Top 0.254: U3.A1 12.71,45.98 13.29,46.56 U2.8 15.16,46.56 15.49,46.23 R10.1
CLK1
  Top 0.254: U5.A1 38.11,45.98 38.69,46.56 U6.8 40.56,46.56 40.89,46.23 R20.1
CLK2
  Top 0.254: U8.A1 63.51,45.98 64.09,46.56 U9.8 65.96,46.56 66.29,46.23 R30.1
CLK3
  Top 0.254: U11.A1 88.91,45.98 89.49,46.56 U12.8 91.36,46.56 91.69,46.23 R40.1
CLK4
  Top 0.254: U14.A1 12.71,70.11 13.29,70.69 U15.8 15.16,70.69 15.49,70.36 R50.1
CLK5
  Top 0.254: U17.A1 38.11,70.11 38.69,70.69 U18.8 40.56,70.69 40.89,70.36 R60.1
CLK6
  Top 0.254: U20.A1 63.51,70.11 64.09,70.69 U21.8 65.96,70.69 66.29,70.36 R70.1
CLK7
  Top 0.254: U23.A1 88.91,70.11 89.49,70.69 U24.8 91.36,70.69 91.69,70.36 R80.1
CNT
  Top 0.61: S2.A1 S2.A2 9.63,17.11 X1.4
CNT1  (via drill 0.41)
  Top 0.254: v9.91,49.78 8.56,49.78 U2.2
  Bottom 0.254: v9.91,49.78 7.87,49.78 7.58,49.49 X2.4 8.54,46.07 9.3,45.31 11.78,45.31 13.84,47.37 16.64,47.37 17.27,46.74 17.27,43.18 16.41,42.32 X3.4
CNT2  (via drill 0.41)
  Top 0.254: v35.31,49.78 33.96,49.78 U6.2
  Bottom 0.254: v35.31,49.78 33.27,49.78 32.98,49.49 X4.4 33.94,46.07 34.7,45.31 37.18,45.31 39.24,47.37 42.04,47.37 42.67,46.74 42.67,43.18 41.81,42.32 X5.4
CNT3  (via drill 0.41)
  Top 0.254: v60.71,49.78 59.36,49.78 U9.2
  Bottom 0.254: v60.71,49.78 58.67,49.78 58.38,49.49 X6.4 59.34,46.07 60.1,45.31 62.58,45.31 64.64,47.37 67.44,47.37 68.07,46.74 68.07,43.18 67.21,42.32 X7.4
CNT4  (via drill 0.41)
  Top 0.254: v86.11,49.78 84.76,49.78 U12.2
  Bottom 0.254: v86.11,49.78 84.07,49.78 83.78,49.49 X8.4 84.74,46.07 85.5,45.31 87.98,45.31 90.04,47.37 92.84,47.37 93.47,46.74 93.47,43.18 92.61,42.32 X9.4
CNT5  (via drill 0.41)
  Top 0.254: v9.91,73.91 8.56,73.91 U15.2
  Bottom 0.254: v9.91,73.91 7.87,73.91 7.58,73.62 X10.4 8.54,70.2 9.3,69.44 11.78,69.44 13.84,71.5 16.64,71.5 17.27,70.87 17.27,67.31 16.41,66.45 X11.4
CNT6  (via drill 0.41)
  Top 0.254: v35.31,73.91 33.96,73.91 U18.2
  Bottom 0.254: v35.31,73.91 33.27,73.91 32.98,73.62 X12.4 33.94,70.2 34.7,69.44 37.18,69.44 39.24,71.5 42.04,71.5 42.67,70.87 42.67,67.31 41.81,66.45 X13.4
CNT7  (via drill 0.41)
  Top 0.254: v60.71,73.91 59.36,73.91 U21.2
  Bottom 0.254: v60.71,73.91 58.67,73.91 58.38,73.62 X14.4 59.34,70.2 60.1,69.44 62.58,69.44 64.64,71.5 67.44,71.5 68.07,70.87 68.07,67.31 67.21,66.45 X15.4
CNT8  (via drill 0.41)
  Top 0.254: v86.11,73.91 84.76,73.91 U24.2
  Bottom 0.254: v86.11,73.91 84.07,73.91 83.78,73.62 X16.4 84.74,70.2 85.5,69.44 87.98,69.44 90.04,71.5 92.84,71.5 93.47,70.87 93.47,67.31 92.61,66.45 X17.4
DAT
  Top 0.254: U3.B1 10.16,46.74 10.64,47.21 U2.9 16.29,47.21 17.02,46.48 R9.1
DAT1
  Top 0.254: U5.B1 35.56,46.74 36.04,47.21 U6.9 41.69,47.21 42.42,46.48 R19.1
DAT2
  Top 0.254: U8.B1 60.96,46.74 61.44,47.21 U9.9 67.09,47.21 67.82,46.48 R29.1
DAT3
  Top 0.254: U11.B1 86.36,46.74 86.84,47.21 U12.9 92.49,47.21 93.22,46.48 R39.1
DAT4
  Top 0.254: U14.B1 10.16,70.87 10.64,71.34 U15.9 16.29,71.34 17.02,70.61 R49.1
DAT5
  Top 0.254: U17.B1 35.56,70.87 36.04,71.34 U18.9 41.69,71.34 42.42,70.61 R59.1
DAT6
  Top 0.254: U20.B1 60.96,70.87 61.44,71.34 U21.9 67.09,71.34 67.82,70.61 R69.1
DAT7
  Top 0.254: U23.B1 86.36,70.87 86.84,71.34 U24.9 92.49,71.34 93.22,70.61 R79.1
GND1  (via drill 0.41)
  Top 0.254: C2.2 7.11,36.07 7.11,37.08 v6.86,37.34 | U1.1 8.64,37.59 7.11,37.59 v6.86,37.34 | U3.A3 13.56,43.59 13.72,43.43 13.72,42.87 v13.74,42.87 | T1.E 15.75,37.59 14.99,36.83 14.99,35.31 14.73,35.05 13.46,35.05 13.21,35.31 | 13.21,35.31 13.21,36.83 12.7,37.34 12.45,37.34 12.45,37.59 T2.E | 13.21,35.31 v13.21,35.05 | C1.2 6.69,37.5 v6.86,37.34 | 16.76,50.8 15.49,50.8 15.16,50.46 U2.14 | 16.76,50.8 v16.76,51.31 | R2.1 17.78,49.78 16.76,50.8
  pour Bottom: 0,34.29 22.86,34.29 22.86,54.61 0,54.61
GND2  (via drill 0.41)
  Top 0.254: C4.2 32.51,36.07 32.51,37.08 v32.26,37.34 | U4.1 34.04,37.59 32.51,37.59 v32.26,37.34 | U5.A3 38.96,43.59 39.12,43.43 39.12,42.87 v39.14,42.87 | T3.E 41.15,37.59 40.39,36.83 40.39,35.31 40.13,35.05 38.86,35.05 38.61,35.31 | 38.61,35.31 38.61,36.83 38.1,37.34 37.85,37.34 37.85,37.59 T4.E | 38.61,35.31 v38.61,35.05 | C3.2 32.09,37.5 v32.26,37.34 | 42.16,50.8 40.89,50.8 40.56,50.46 U6.14 | 42.16,50.8 v42.16,51.31 | R16.1 43.18,49.78 42.16,50.8
  pour Bottom: 25.4,34.29 48.26,34.29 48.26,54.61 25.4,54.61
GND3  (via drill 0.41)
  Top 0.254: C6.2 57.91,36.07 57.91,37.08 v57.66,37.34 | U7.1 59.44,37.59 57.91,37.59 v57.66,37.34 | U8.A3 64.36,43.59 64.52,43.43 64.52,42.87 v64.54,42.87 | T5.E 66.55,37.59 65.79,36.83 65.79,35.31 65.53,35.05 64.26,35.05 64.01,35.31 | 64.01,35.31 64.01,36.83 63.5,37.34 63.25,37.34 63.25,37.59 T6.E | 64.01,35.31 v64.01,35.05 | C5.2 57.49,37.5 v57.66,37.34 | 67.56,50.8 66.29,50.8 65.96,50.46 U9.14 | 67.56,50.8 v67.56,51.31 | R26.1 68.58,49.78 67.56,50.8
  pour Bottom: 50.8,34.29 73.66,34.29 73.66,54.61 50.8,54.61
GND4  (via drill 0.41)
  Top 0.254: C8.2 83.31,36.07 83.31,37.08 v83.06,37.34 | U10.1 84.84,37.59 83.31,37.59 v83.06,37.34 | U11.A3 89.76,43.59 89.92,43.43 89.92,42.87 v89.94,42.87 | T7.E 91.95,37.59 91.19,36.83 91.19,35.31 90.93,35.05 89.66,35.05 89.41,35.31 | 89.41,35.31 89.41,36.83 88.9,37.34 88.65,37.34 88.65,37.59 T8.E | 89.41,35.31 v89.41,35.05 | C7.2 82.89,37.5 v83.06,37.34 | 92.96,50.8 91.69,50.8 91.36,50.46 U12.14 | 92.96,50.8 v92.96,51.31 | R36.1 93.98,49.78 92.96,50.8
  pour Bottom: 76.2,34.29 98.3,33.53 99.06,54.61 76.2,54.61
GND5  (via drill 0.41)
  Top 0.254: C10.2 7.11,60.2 7.11,61.21 v6.86,61.47 | U13.1 8.64,61.72 7.11,61.72 v6.86,61.47 | U14.A3 13.56,67.72 13.72,67.56 13.72,67 v13.74,67 | T9.E 15.75,61.72 14.99,60.96 14.99,59.44 14.73,59.18 13.46,59.18 13.21,59.44 | 13.21,59.44 13.21,60.96 12.7,61.47 12.45,61.47 12.45,61.72 T10.E | 13.21,59.44 v13.21,59.18 | C9.2 6.69,61.63 v6.86,61.47 | 16.76,74.93 15.49,74.93 15.16,74.59 U15.14 | 16.76,74.93 v16.76,75.44 | R46.1 17.78,73.91 16.76,74.93
  pour Bottom: 0,58.42 22.86,58.42 22.86,78.74 0,78.74
GND6  (via drill 0.41)
  Top 0.254: C12.2 32.51,60.2 32.51,61.21 v32.26,61.47 | U16.1 34.04,61.72 32.51,61.72 v32.26,61.47 | U17.A3 38.96,67.72 39.12,67.56 39.12,67 v39.14,67 | T11.E 41.15,61.72 40.39,60.96 40.39,59.44 40.13,59.18 38.86,59.18 38.61,59.44 | 38.61,59.44 38.61,60.96 38.1,61.47 37.85,61.47 37.85,61.72 T12.E | 38.61,59.44 v38.61,59.18 | C11.2 32.09,61.63 v32.26,61.47 | 42.16,74.93 40.89,74.93 40.56,74.59 U18.14 | 42.16,74.93 v42.16,75.44 | R56.1 43.18,73.91 42.16,74.93
  pour Bottom: 25.4,58.42 48.26,58.42 48.26,78.74 25.4,78.74
GND7  (via drill 0.41)
  Top 0.254: C14.2 57.91,60.2 57.91,61.21 v57.66,61.47 | U19.1 59.44,61.72 57.91,61.72 v57.66,61.47 | U20.A3 64.36,67.72 64.52,67.56 64.52,67 v64.54,67 | T13.E 66.55,61.72 65.79,60.96 65.79,59.44 65.53,59.18 64.26,59.18 64.01,59.44 | 64.01,59.44 64.01,60.96 63.5,61.47 63.25,61.47 63.25,61.72 T14.E | 64.01,59.44 v64.01,59.18 | C13.2 57.49,61.63 v57.66,61.47 | 67.56,74.93 66.29,74.93 65.96,74.59 U21.14 | 67.56,74.93 v67.56,75.44 | R66.1 68.58,73.91 67.56,74.93
  pour Bottom: 50.8,58.42 73.66,58.42 73.66,78.74 50.8,78.74
GND8  (via drill 0.41)
  Top 0.254: C16.2 83.31,60.2 83.31,61.21 v83.06,61.47 | U22.1 84.84,61.72 83.31,61.72 v83.06,61.47 | U23.A3 89.76,67.72 89.92,67.56 89.92,67 v89.94,67 | T15.E 91.95,61.72 91.19,60.96 91.19,59.44 90.93,59.18 89.66,59.18 89.41,59.44 | 89.41,59.44 89.41,60.96 88.9,61.47 88.65,61.47 88.65,61.72 T16.E | 89.41,59.44 v89.41,59.18 | C15.2 82.89,61.63 v83.06,61.47 | 92.96,74.93 91.69,74.93 91.36,74.59 U24.14 | 92.96,74.93 v92.96,75.44 | R76.1 93.98,73.91 92.96,74.93
  pour Bottom: 76.2,58.42 99.06,58.42 99.06,78.74 76.2,78.74
GND9
  Top 0.406: S2.B1 S2.B2 | S1.B2 S1.B1
  pour Top: 0,30.48 92.71,30.48 92.71,0 0,0
INT
  Top 0.254: U2.7 8.53,44.05 8.99,43.59 U3.B3
INT1
  Top 0.254: U6.7 33.93,44.05 34.39,43.59 U5.B3
INT2
  Top 0.254: U9.7 59.33,44.05 59.79,43.59 U8.B3
INT3
  Top 0.254: U12.7 84.73,44.05 85.19,43.59 U11.B3
INT4
  Top 0.254: U15.7 8.53,68.18 8.99,67.72 U14.B3
INT5
  Top 0.254: U18.7 33.93,68.18 34.39,67.72 U17.B3
INT6
  Top 0.254: U21.7 59.33,68.18 59.79,67.72 U20.B3
INT7
  Top 0.254: U24.7 84.73,68.18 85.19,67.72 U23.B3
LED  (via drill 0.41)
  Top 0.254: D2.C 2.79,47.24 3.05,47.5 5.59,47.5 5.84,47.24 5.84,45.21 6.35,44.7 6.35,43.18 8.13,41.4 11.68,41.4 12.45,40.64 13.46,40.64 13.72,40.39 v13.72,39.62 14.99,39.62 T1.C | D1.C 20.07,40.13 18.29,38.35 v18.29,37.85
  Bottom 0.254: v18.29,37.85 15.49,37.85 v13.72,39.62
LED1  (via drill 0.41)
  Top 0.254: D5.C 28.19,47.24 28.45,47.5 30.99,47.5 31.24,47.24 31.24,45.21 31.75,44.7 31.75,43.18 33.53,41.4 37.08,41.4 37.85,40.64 38.86,40.64 39.12,40.39 v39.12,39.62 40.39,39.62 T3.C | D6.C 45.47,40.13 43.69,38.35 v43.69,37.85
  Bottom 0.254: v43.69,37.85 40.89,37.85 v39.12,39.62
LED2  (via drill 0.41)
  Top 0.254: D9.C 53.59,47.24 53.85,47.5 56.39,47.5 56.64,47.24 56.64,45.21 57.15,44.7 57.15,43.18 58.93,41.4 62.48,41.4 63.25,40.64 64.26,40.64 64.52,40.39 v64.52,39.62 65.79,39.62 T5.C | D10.C 70.87,40.13 69.09,38.35 v69.09,37.85
  Bottom 0.254: v69.09,37.85 66.29,37.85 v64.52,39.62
LED3  (via drill 0.41)
  Top 0.254: D13.C 78.99,47.24 79.25,47.5 81.79,47.5 82.04,47.24 82.04,45.21 82.55,44.7 82.55,43.18 84.33,41.4 87.88,41.4 88.65,40.64 89.66,40.64 89.92,40.39 v89.92,39.62 91.19,39.62 T7.C | D14.C 96.27,40.13 94.49,38.35 v94.49,37.85
  Bottom 0.254: v94.49,37.85 91.69,37.85 v89.92,39.62
LED4  (via drill 0.41)
  Top 0.254: D17.C 2.79,71.37 3.05,71.63 5.59,71.63 5.84,71.37 5.84,69.34 6.35,68.83 6.35,67.31 8.13,65.53 11.68,65.53 12.45,64.77 13.46,64.77 13.72,64.52 v13.72,63.75 14.99,63.75 T9.C | D18.C 20.07,64.26 18.29,62.48 v18.29,61.98
  Bottom 0.254: v18.29,61.98 15.49,61.98 v13.72,63.75
LED5  (via drill 0.41)
  Top 0.254: D21.C 28.19,71.37 28.45,71.63 30.99,71.63 31.24,71.37 31.24,69.34 31.75,68.83 31.75,67.31 33.53,65.53 37.08,65.53 37.85,64.77 38.86,64.77 39.12,64.52 v39.12,63.75 40.39,63.75 T11.C | D22.C 45.47,64.26 43.69,62.48 v43.69,61.98
  Bottom 0.254: v43.69,61.98 40.89,61.98 v39.12,63.75
LED6  (via drill 0.41)
  Top 0.254: D25.C 53.59,71.37 53.85,71.63 56.39,71.63 56.64,71.37 56.64,69.34 57.15,68.83 57.15,67.31 58.93,65.53 62.48,65.53 63.25,64.77 64.26,64.77 64.52,64.52 v64.52,63.75 65.79,63.75 T13.C | D26.C 70.87,64.26 69.09,62.48 v69.09,61.98
  Bottom 0.254: v69.09,61.98 66.29,61.98 v64.52,63.75
LED7  (via drill 0.41)
  Top 0.254: D29.C 78.99,71.37 79.25,71.63 81.79,71.63 82.04,71.37 82.04,69.34 82.55,68.83 82.55,67.31 84.33,65.53 87.88,65.53 88.65,64.77 89.66,64.77 89.92,64.52 v89.92,63.75 91.19,63.75 T15.C | D30.C 96.27,64.26 94.49,62.48 v94.49,61.98
  Bottom 0.254: v94.49,61.98 91.69,61.98 v89.92,63.75
N$1
  Top 0.254: D4.A R7.1
N$2  (via drill 0.41)
  Top 0.254: D4.C 5.22,46.6 5.33,46.48 5.33,44.96 5.84,44.45 5.84,42.93 7.87,40.89 10.16,40.89 | 10.16,40.89 11.18,40.89 11.43,40.64 T2.C | v10.16,40.64 10.16,40.89 | v17.48,41.91 18.54,41.91 D3.C
  Bottom 0.254: v10.16,40.64 10.92,41.4 16.51,41.4 17.02,41.91 v17.48,41.91
N$3
  Top 0.254: T2.B 10.48,36.17 R8.1
N$4
  Bottom 0.61: G1.P 20.32,12.96 S3.P$2
N$5
  Top 0.254: D5.A R11.1
N$6
  Top 0.254: D2.A R4.1
N$7
  Top 0.254: R3.1 D1.A
N$8
  Top 0.254: R12.1 D6.A
N$9
  Top 0.254: T3.B 39.44,36.17 R13.1
N$10
  Top 0.254: R6.1 D3.A
N$11
  Top 0.254: R14.1 D7.A
N$12
  Top 0.254: D8.A R17.1
N$13  (via drill 0.41)
  Top 0.254: D8.C 30.62,46.6 30.73,46.48 30.73,44.96 31.24,44.45 31.24,42.93 33.27,40.89 35.56,40.89 | 35.56,40.89 36.58,40.89 36.83,40.64 T4.C | v35.56,40.64 35.56,40.89 | v42.88,41.91 43.94,41.91 D7.C
  Bottom 0.254: v35.56,40.64 36.32,41.4 41.91,41.4 42.42,41.91 v42.88,41.91
N$14
  Top 0.254: T4.B 35.88,36.17 R18.1
N$15
  Top 0.254: D9.A R21.1
N$16
  Top 0.254: R22.1 D10.A
N$17
  Top 0.254: T5.B 64.84,36.17 R23.1
N$18
  Top 0.254: T1.B 14.04,36.17 R5.1
N$19
  Top 0.254: R24.1 D11.A
N$20
  Top 0.254: D12.A R27.1
N$21  (via drill 0.41)
  Top 0.254: D12.C 56.02,46.6 56.13,46.48 56.13,44.96 56.64,44.45 56.64,42.93 58.67,40.89 60.96,40.89 | 60.96,40.89 61.98,40.89 62.23,40.64 T6.C | v60.96,40.64 60.96,40.89 | v68.28,41.91 69.34,41.91 D11.C
  Bottom 0.254: v60.96,40.64 61.72,41.4 67.31,41.4 67.82,41.91 v68.28,41.91
N$22
  Top 0.254: T6.B 61.28,36.17 R28.1
N$23
  Top 0.254: D13.A R31.1
N$24
  Top 0.254: R32.1 D14.A
N$25
  Top 0.254: T7.B 90.24,36.17 R33.1
N$26
  Top 0.254: R34.1 D15.A
N$27
  Top 0.254: D16.A R37.1
N$28  (via drill 0.41)
  Top 0.254: D16.C 81.42,46.6 81.53,46.48 81.53,44.96 82.04,44.45 82.04,42.93 84.07,40.89 86.36,40.89 | 86.36,40.89 87.38,40.89 87.63,40.64 T8.C | v86.36,40.64 86.36,40.89 | v93.67,41.91 94.74,41.91 D15.C
  Bottom 0.254: v86.36,40.64 87.12,41.4 92.71,41.4 93.22,41.91 v93.67,41.91
N$29
  Top 0.254: T8.B 86.68,36.17 R38.1
N$30
  Top 0.254: D17.A R41.1
N$31
  Top 0.254: R42.1 D18.A
N$32
  Top 0.254: T9.B 14.04,60.3 R43.1
N$33
  Top 0.254: R44.1 D19.A
N$34
  Top 0.254: D20.A R47.1
N$35  (via drill 0.41)
  Top 0.254: D20.C 5.22,70.73 5.33,70.61 5.33,69.09 5.84,68.58 5.84,67.06 7.87,65.02 10.16,65.02 | 10.16,65.02 11.18,65.02 11.43,64.77 T10.C | v10.16,64.77 10.16,65.02 | v17.48,66.04 18.54,66.04 D19.C
  Bottom 0.254: v10.16,64.77 10.92,65.53 16.51,65.53 17.02,66.04 v17.48,66.04
N$36
  Top 0.254: T10.B 10.48,60.3 R48.1
N$37
  Top 0.254: D21.A R51.1
N$38
  Top 0.254: R52.1 D22.A
N$39
  Top 0.254: T11.B 39.44,60.3 R53.1
N$40
  Top 0.254: R54.1 D23.A
N$41
  Top 0.254: D24.A R57.1
N$42  (via drill 0.41)
  Top 0.254: D24.C 30.62,70.73 30.73,70.61 30.73,69.09 31.24,68.58 31.24,67.06 33.27,65.02 35.56,65.02 | 35.56,65.02 36.58,65.02 36.83,64.77 T12.C | v35.56,64.77 35.56,65.02 | v42.88,66.04 43.94,66.04 D23.C
  Bottom 0.254: v35.56,64.77 36.32,65.53 41.91,65.53 42.42,66.04 v42.88,66.04
N$43
  Top 0.254: T12.B 35.88,60.3 R58.1
N$44
  Top 0.254: D25.A R61.1
N$45
  Top 0.254: R62.1 D26.A
N$46
  Top 0.254: T13.B 64.84,60.3 R63.1
N$47
  Top 0.254: R64.1 D27.A
N$48
  Top 0.254: D28.A R67.1
N$49  (via drill 0.41)
  Top 0.254: D28.C 56.02,70.73 56.13,70.61 56.13,69.09 56.64,68.58 56.64,67.06 58.67,65.02 60.96,65.02 | 60.96,65.02 61.98,65.02 62.23,64.77 T14.C | v60.96,64.77 60.96,65.02 | v68.28,66.04 69.34,66.04 D27.C
  Bottom 0.254: v60.96,64.77 61.72,65.53 67.31,65.53 67.82,66.04 v68.28,66.04
N$50
  Top 0.254: T14.B 61.28,60.3 R68.1
N$51
  Top 0.254: D29.A R71.1
N$52
  Top 0.254: R72.1 D30.A
N$53
  Top 0.254: T15.B 90.24,60.3 R73.1
N$54
  Top 0.254: R74.1 D31.A
N$55
  Top 0.254: D32.A R77.1
N$56  (via drill 0.41)
  Top 0.254: D32.C 81.42,70.73 81.53,70.61 81.53,69.09 82.04,68.58 82.04,67.06 84.07,65.02 86.36,65.02 | 86.36,65.02 87.38,65.02 87.63,64.77 T16.C | v86.36,64.77 86.36,65.02 | v93.67,66.04 94.74,66.04 D31.C
  Bottom 0.254: v86.36,64.77 87.12,65.53 92.71,65.53 93.22,66.04 v93.67,66.04
N$57
  Top 0.254: T16.B 86.68,60.3 R78.1
RED_LED
  Top 0.254: R8.2 12.19,36.07 11.43,36.83 11.43,38.61 11.68,38.86 15.75,38.86 16,39.12 16,40.89 15.75,41.15 12.7,41.15 11.94,41.91 8.38,41.91 6.86,43.43 6.86,44.96 6.35,45.47 6.35,47.5 7.37,48.51 U2.4
RED_LED1
  Top 0.254: R18.2 37.59,36.07 36.83,36.83 36.83,38.61 37.08,38.86 41.15,38.86 41.4,39.12 41.4,40.89 41.15,41.15 38.1,41.15 37.34,41.91 33.78,41.91 32.26,43.43 32.26,44.96 31.75,45.47 31.75,47.5 32.77,48.51 U6.4
RED_LED2
  Top 0.254: R28.2 62.99,36.07 62.23,36.83 62.23,38.61 62.48,38.86 66.55,38.86 66.8,39.12 66.8,40.89 66.55,41.15 63.5,41.15 62.74,41.91 59.18,41.91 57.66,43.43 57.66,44.96 57.15,45.47 57.15,47.5 58.17,48.51 U9.4
RED_LED3
  Top 0.254: R38.2 88.39,36.07 87.63,36.83 87.63,38.61 87.88,38.86 91.95,38.86 92.2,39.12 92.2,40.89 91.95,41.15 88.9,41.15 88.14,41.91 84.58,41.91 83.06,43.43 83.06,44.96 82.55,45.47 82.55,47.5 83.57,48.51 U12.4
RED_LED4
  Top 0.254: R48.2 12.19,60.2 11.43,60.96 11.43,62.74 11.68,62.99 15.75,62.99 16,63.25 16,65.02 15.75,65.28 12.7,65.28 11.94,66.04 8.38,66.04 6.86,67.56 6.86,69.09 6.35,69.6 6.35,71.63 7.37,72.64 U15.4
RED_LED5
  Top 0.254: R58.2 37.59,60.2 36.83,60.96 36.83,62.74 37.08,62.99 41.15,62.99 41.4,63.25 41.4,65.02 41.15,65.28 38.1,65.28 37.34,66.04 33.78,66.04 32.26,67.56 32.26,69.09 31.75,69.6 31.75,71.63 32.77,72.64 U18.4
RED_LED6
  Top 0.254: R68.2 62.99,60.2 62.23,60.96 62.23,62.74 62.48,62.99 66.55,62.99 66.8,63.25 66.8,65.02 66.55,65.28 63.5,65.28 62.74,66.04 59.18,66.04 57.66,67.56 57.66,69.09 57.15,69.6 57.15,71.63 58.17,72.64 U21.4
RED_LED7
  Top 0.254: R78.2 88.39,60.2 87.63,60.96 87.63,62.74 87.88,62.99 91.95,62.99 92.2,63.25 92.2,65.02 91.95,65.28 88.9,65.28 88.14,66.04 84.58,66.04 83.06,67.56 83.06,69.09 82.55,69.6 82.55,71.63 83.57,72.64 U24.4
RST
  Top 0.254: R1.1 15.49,48.26 15.1,47.86 U2.10 13.35,47.86 12.7,48.51 12.7,51.56 11.68,52.58 JP1.2
RST1
  Top 0.254: R15.1 40.89,48.26 40.5,47.86 U6.10 38.75,47.86 38.1,48.51 38.1,51.56 37.08,52.58 JP2.2
RST2
  Top 0.254: R25.1 66.29,48.26 65.9,47.86 U9.10 64.15,47.86 63.5,48.51 63.5,51.56 62.48,52.58 JP3.2
RST3
  Top 0.254: R35.1 91.69,48.26 91.3,47.86 U12.10 89.55,47.86 88.9,48.51 88.9,51.56 87.88,52.58 JP4.2
RST4
  Top 0.254: R45.1 15.49,72.39 15.1,71.99 U15.10 13.35,71.99 12.7,72.64 12.7,75.69 11.68,76.71 JP5.2
RST5
  Top 0.254: R55.1 40.89,72.39 40.5,71.99 U18.10 38.75,71.99 38.1,72.64 38.1,75.69 37.08,76.71 JP6.2
RST6
  Top 0.254: R65.1 66.29,72.39 65.9,71.99 U21.10 64.15,71.99 63.5,72.64 63.5,75.69 62.48,76.71 JP7.2
RST7
  Top 0.254: R75.1 91.69,72.39 91.3,71.99 U24.10 89.55,71.99 88.9,72.64 88.9,75.69 87.88,76.71 JP8.2
SET
  Top 0.61: S1.A1 S1.A2 17.14,15.87 X1.3
SET1  (via drill 0.41)
  Top 0.254: v6.86,49.02 7,49.16 U2.3
  Bottom 0.254: v6.86,49.02 7.11,48.77 7.11,47.24 6.86,46.99 6.35,46.99 6.1,46.74 6.1,44.96 6.23,44.82 X2.3 12.05,44.82 14.1,46.86 16.38,46.86 16.76,46.48 16.76,43.94 16.39,43.57 X3.3
SET2  (via drill 0.41)
  Top 0.254: v32.26,49.02 32.4,49.16 U6.3
  Bottom 0.254: v32.26,49.02 32.51,48.77 32.51,47.24 32.26,46.99 31.75,46.99 31.5,46.74 31.5,44.96 31.63,44.82 X4.3 37.45,44.82 39.5,46.86 41.78,46.86 42.16,46.48 42.16,43.94 41.79,43.57 X5.3
SET3  (via drill 0.41)
  Top 0.254: v57.66,49.02 57.8,49.16 U9.3
  Bottom 0.254: v57.66,49.02 57.91,48.77 57.91,47.24 57.66,46.99 57.15,46.99 56.9,46.74 56.9,44.96 57.03,44.82 X6.3 62.85,44.82 64.9,46.86 67.18,46.86 67.56,46.48 67.56,43.94 67.19,43.57 X7.3
SET4  (via drill 0.41)
  Top 0.254: v83.06,49.02 83.2,49.16 U12.3
  Bottom 0.254: v83.06,49.02 83.31,48.77 83.31,47.24 83.06,46.99 82.55,46.99 82.3,46.74 82.3,44.96 82.43,44.82 X8.3 88.25,44.82 90.3,46.86 92.58,46.86 92.96,46.48 92.96,43.94 92.59,43.57 X9.3
SET5  (via drill 0.41)
  Top 0.254: v6.86,73.15 7,73.29 U15.3
  Bottom 0.254: v6.86,73.15 7.11,72.9 7.11,71.37 6.86,71.12 6.35,71.12 6.1,70.87 6.1,69.09 6.23,68.95 X10.3 12.05,68.95 14.1,70.99 16.38,70.99 16.76,70.61 16.76,68.07 16.39,67.7 X11.3
SET6  (via drill 0.41)
  Top 0.254: v32.26,73.15 32.4,73.29 U18.3
  Bottom 0.254: v32.26,73.15 32.51,72.9 32.51,71.37 32.26,71.12 31.75,71.12 31.5,70.87 31.5,69.09 31.63,68.95 X12.3 37.45,68.95 39.5,70.99 41.78,70.99 42.16,70.61 42.16,68.07 41.79,67.7 X13.3
SET7  (via drill 0.41)
  Top 0.254: v57.66,73.15 57.8,73.29 U21.3
  Bottom 0.254: v57.66,73.15 57.91,72.9 57.91,71.37 57.66,71.12 57.15,71.12 56.9,70.87 56.9,69.09 57.03,68.95 X14.3 62.85,68.95 64.9,70.99 67.18,70.99 67.56,70.61 67.56,68.07 67.19,67.7 X15.3
SET8  (via drill 0.41)
  Top 0.254: v83.06,73.15 83.2,73.29 U24.3
  Bottom 0.254: v83.06,73.15 83.31,72.9 83.31,71.37 83.06,71.12 82.55,71.12 82.3,70.87 82.3,69.09 82.43,68.95 X16.3 88.25,68.95 90.3,70.99 92.58,70.99 92.96,70.61 92.96,68.07 92.59,67.7 X17.3
SYNC
  Top 0.254: U2.6 7.59,47.21 7.37,46.99 7.37,45.97 7.87,45.47 7.87,43.94 8.89,42.93 12.45,42.93 13.21,42.16 14.22,42.16 14.48,42.42 14.48,43.94 14.22,44.2 U3.A2 | U3.A2
SYNC1
  Top 0.254: U6.6 32.99,47.21 32.77,46.99 32.77,45.97 33.27,45.47 33.27,43.94 34.29,42.93 37.85,42.93 38.61,42.16 39.62,42.16 39.88,42.42 39.88,43.94 39.62,44.2 U5.A2 | U5.A2
SYNC2
  Top 0.254: U9.6 58.39,47.21 58.17,46.99 58.17,45.97 58.67,45.47 58.67,43.94 59.69,42.93 63.25,42.93 64.01,42.16 65.02,42.16 65.28,42.42 65.28,43.94 65.02,44.2 U8.A2 | U8.A2
SYNC3
  Top 0.254: U12.6 83.79,47.21 83.57,46.99 83.57,45.97 84.07,45.47 84.07,43.94 85.09,42.93 88.65,42.93 89.41,42.16 90.42,42.16 90.68,42.42 90.68,43.94 90.42,44.2 U11.A2 | U11.A2
SYNC4
  Top 0.254: U15.6 7.59,71.34 7.37,71.12 7.37,70.1 7.87,69.6 7.87,68.07 8.89,67.06 12.45,67.06 13.21,66.29 14.22,66.29 14.48,66.55 14.48,68.07 14.22,68.33 U14.A2 | U14.A2
SYNC5
  Top 0.254: U18.6 32.99,71.34 32.77,71.12 32.77,70.1 33.27,69.6 33.27,68.07 34.29,67.06 37.85,67.06 38.61,66.29 39.62,66.29 39.88,66.55 39.88,68.07 39.62,68.33 U17.A2 | U17.A2
SYNC6
  Top 0.254: U21.6 58.39,71.34 58.17,71.12 58.17,70.1 58.67,69.6 58.67,68.07 59.69,67.06 63.25,67.06 64.01,66.29 65.02,66.29 65.28,66.55 65.28,68.07 65.02,68.33 U20.A2 | U20.A2
SYNC7
  Top 0.254: U24.6 83.79,71.34 83.57,71.12 83.57,70.1 84.07,69.6 84.07,68.07 85.09,67.06 88.65,67.06 89.41,66.29 90.42,66.29 90.68,66.55 90.68,68.07 90.42,68.33 U23.A2 | U23.A2
TEST
  Top 0.254: R2.2 15.49,49.78 15.24,49.53 15.24,48.77 14.99,48.51 U2.11 13.46,48.51 13.21,48.77 13.21,51.56 13.97,52.32 JP1.1
TEST1
  Top 0.254: R16.2 40.89,49.78 40.64,49.53 40.64,48.77 40.39,48.51 U6.11 38.86,48.51 38.61,48.77 38.61,51.56 39.37,52.32 JP2.1
TEST2
  Top 0.254: R26.2 66.29,49.78 66.04,49.53 66.04,48.77 65.79,48.51 U9.11 64.26,48.51 64.01,48.77 64.01,51.56 64.77,52.32 JP3.1
TEST3
  Top 0.254: R36.2 91.69,49.78 91.44,49.53 91.44,48.77 91.19,48.51 U12.11 89.66,48.51 89.41,48.77 89.41,51.56 90.17,52.32 JP4.1
TEST4
  Top 0.254: R46.2 15.49,73.91 15.24,73.66 15.24,72.9 14.99,72.64 U15.11 13.46,72.64 13.21,72.9 13.21,75.69 13.97,76.45 JP5.1
TEST5
  Top 0.254: R56.2 40.89,73.91 40.64,73.66 40.64,72.9 40.39,72.64 U18.11 38.86,72.64 38.61,72.9 38.61,75.69 39.37,76.45 JP6.1
TEST6
  Top 0.254: R66.2 66.29,73.91 66.04,73.66 66.04,72.9 65.79,72.64 U21.11 64.26,72.64 64.01,72.9 64.01,75.69 64.77,76.45 JP7.1
TEST7
  Top 0.254: R76.2 91.69,73.91 91.44,73.66 91.44,72.9 91.19,72.64 U24.11 89.66,72.64 89.41,72.9 89.41,75.69 90.17,76.45 JP8.1
VIN
  Top 0.61: S3.P$1 25.36,5.08 30.48,5.08 38.77,13.37 X1.1
VIN1  (via drill 0.41)
  Top 0.254: C1.1 5.51,38.52 6.43,38.52 U1.3 6.52,39.29 v7.11,39.88
  Bottom 0.254: X3.1 15.24,45.97 13.97,45.97 10.41,42.42 7.62,42.42 X2.1 7.58,40.35 v7.11,39.88
VIN2  (via drill 0.41)
  Top 0.254: C3.1 30.91,38.52 31.83,38.52 U4.3 31.92,39.29 v32.51,39.88
  Bottom 0.254: X5.1 40.64,45.97 39.37,45.97 35.81,42.42 33.02,42.42 X4.1 32.98,40.35 v32.51,39.88
VIN3  (via drill 0.41)
  Top 0.254: C5.1 56.31,38.52 57.23,38.52 U7.3 57.32,39.29 v57.91,39.88
  Bottom 0.254: X7.1 66.04,45.97 64.77,45.97 61.21,42.42 58.42,42.42 X6.1 58.38,40.35 v57.91,39.88
VIN4  (via drill 0.41)
  Top 0.254: C7.1 81.71,38.52 82.63,38.52 U10.3 82.72,39.29 v83.31,39.88
  Bottom 0.254: X9.1 91.44,45.97 90.17,45.97 86.61,42.42 83.82,42.42 X8.1 83.78,40.35 v83.31,39.88
VIN5  (via drill 0.41)
  Top 0.254: C9.1 5.51,62.65 6.43,62.65 U13.3 6.52,63.42 v7.11,64.01
  Bottom 0.254: X11.1 15.24,70.1 13.97,70.1 10.41,66.55 7.62,66.55 X10.1 7.58,64.48 v7.11,64.01
VIN6  (via drill 0.41)
  Top 0.254: C11.1 30.91,62.65 31.83,62.65 U16.3 31.92,63.42 v32.51,64.01
  Bottom 0.254: X13.1 40.64,70.1 39.37,70.1 35.81,66.55 33.02,66.55 X12.1 32.98,64.48 v32.51,64.01
VIN7  (via drill 0.41)
  Top 0.254: C13.1 56.31,62.65 57.23,62.65 U19.3 57.32,63.42 v57.91,64.01
  Bottom 0.254: X15.1 66.04,70.1 64.77,70.1 61.21,66.55 58.42,66.55 X14.1 58.38,64.48 v57.91,64.01
VIN8  (via drill 0.41)
  Top 0.254: C15.1 81.71,62.65 82.63,62.65 U22.3 82.72,63.42 v83.31,64.01
  Bottom 0.254: X17.1 91.44,70.1 90.17,70.1 86.61,66.55 83.82,66.55 X16.1 83.78,64.48 v83.31,64.01

## Text on the board
tPlace: Target r3 | Target r3 | Target r3 | Target r3 | DEFCONBOTS.ORG | DEFCONBOTS.ORG | DEFCONBOTS.ORG | DEFCONBOTS.ORG | Target r3 | Target r3 | Target r3 | Target r3 | DEFCONBOTS.ORG | DEFCONBOTS.ORG | DEFCONBOTS.ORG | DEFCONBOTS.ORG | CNT | SET | ON-> | Target Controller R0 / Designed by Jotux / May-2014 / DEFCONBOTS.ORG